# Altium PCB PCB1.PcbDoc
Units mm, origin at the board's own origin, x right, y up, seen from the top; angles counter-clockwise.
Board outline 50.04 x 50.04 mm, 2 copper layers (Top Layer, Bottom Layer); 16 components, 19 nets, 128 pads, 32 vias.
Unrouted connection lines stored in the file: 1.
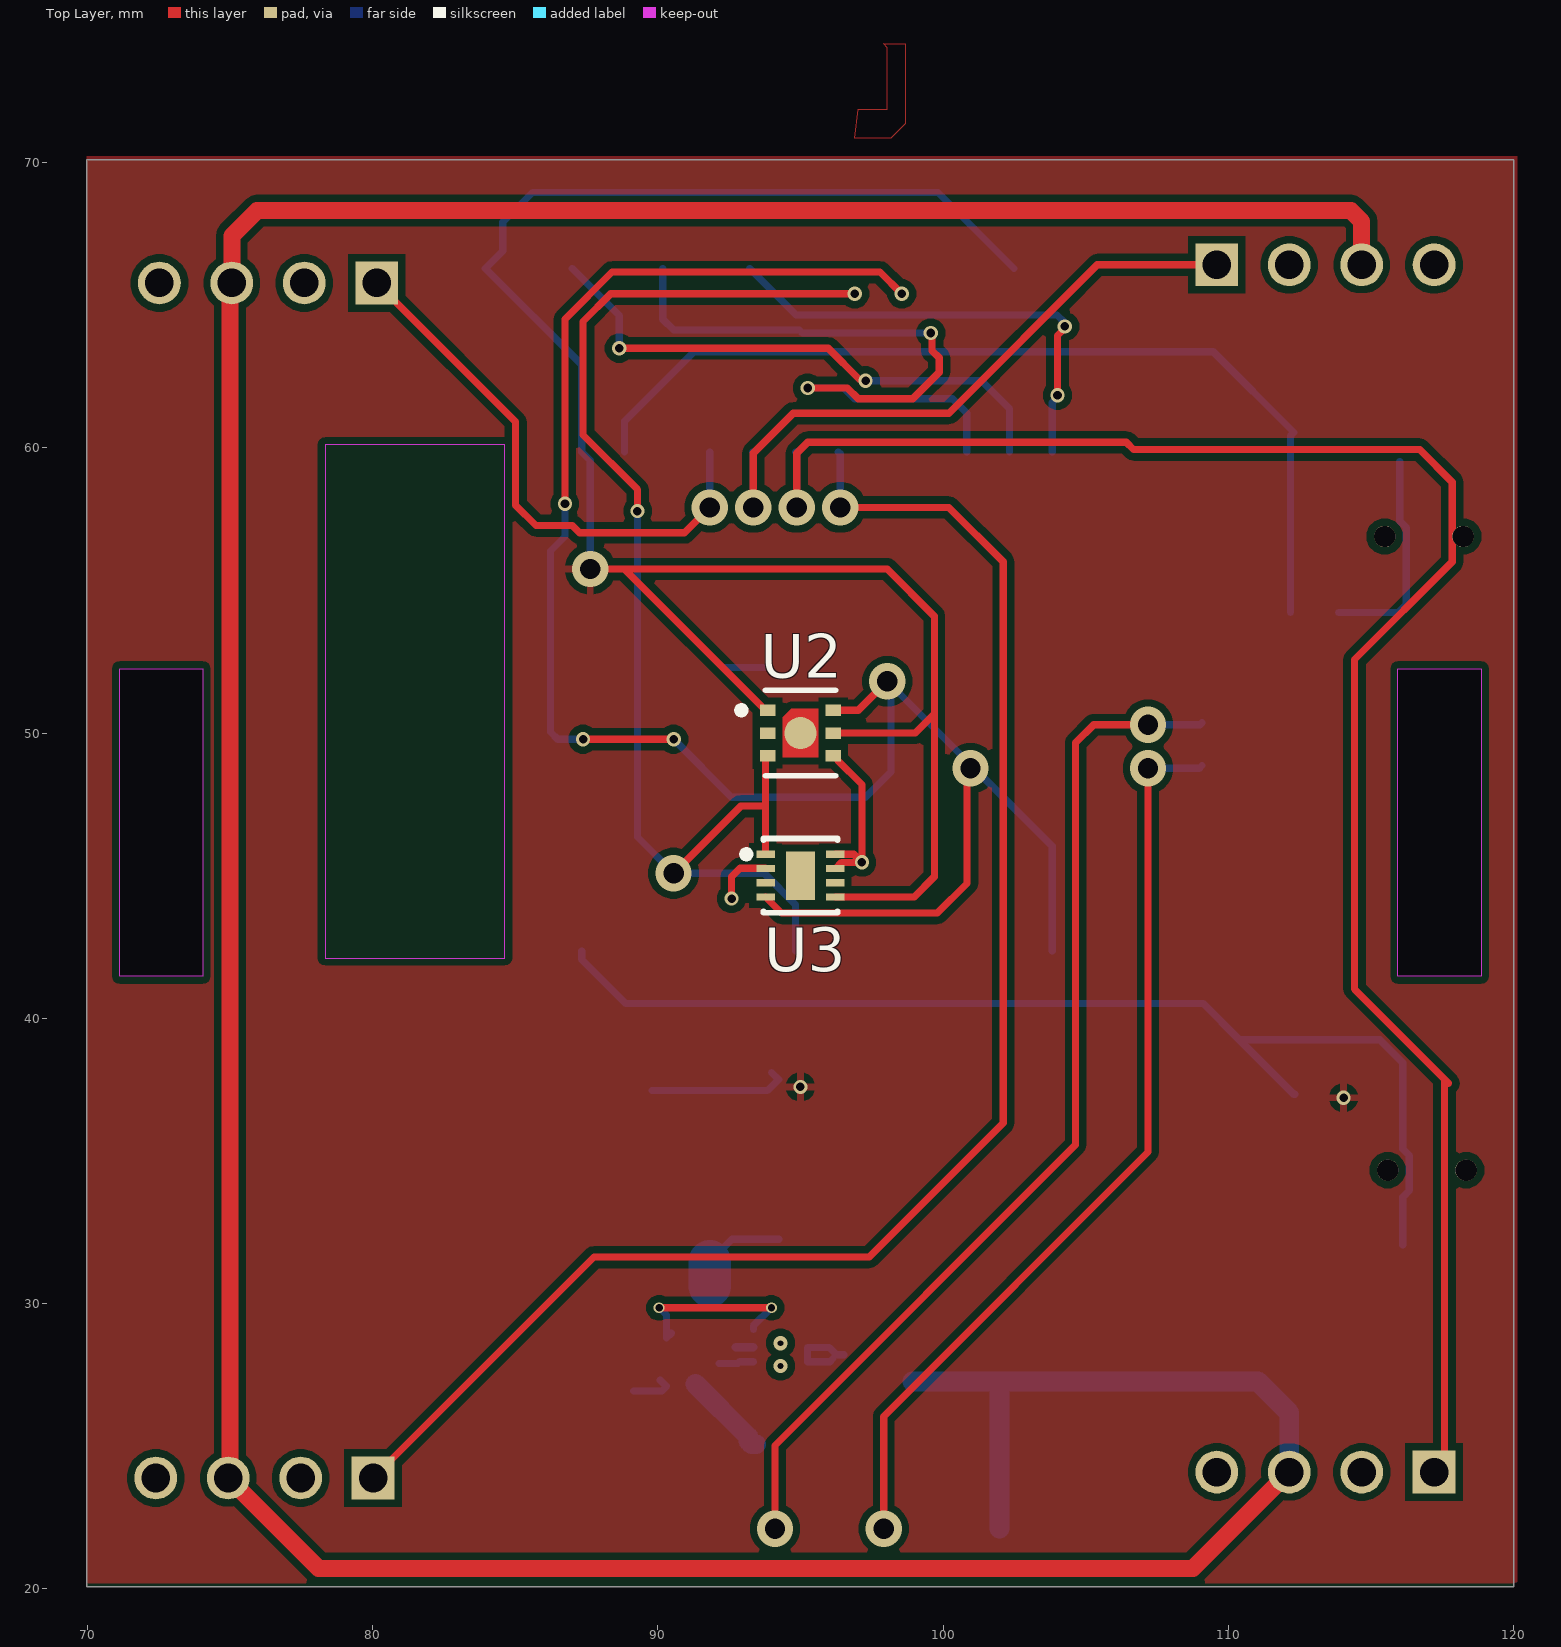
[diagram p0: Top Layer view]
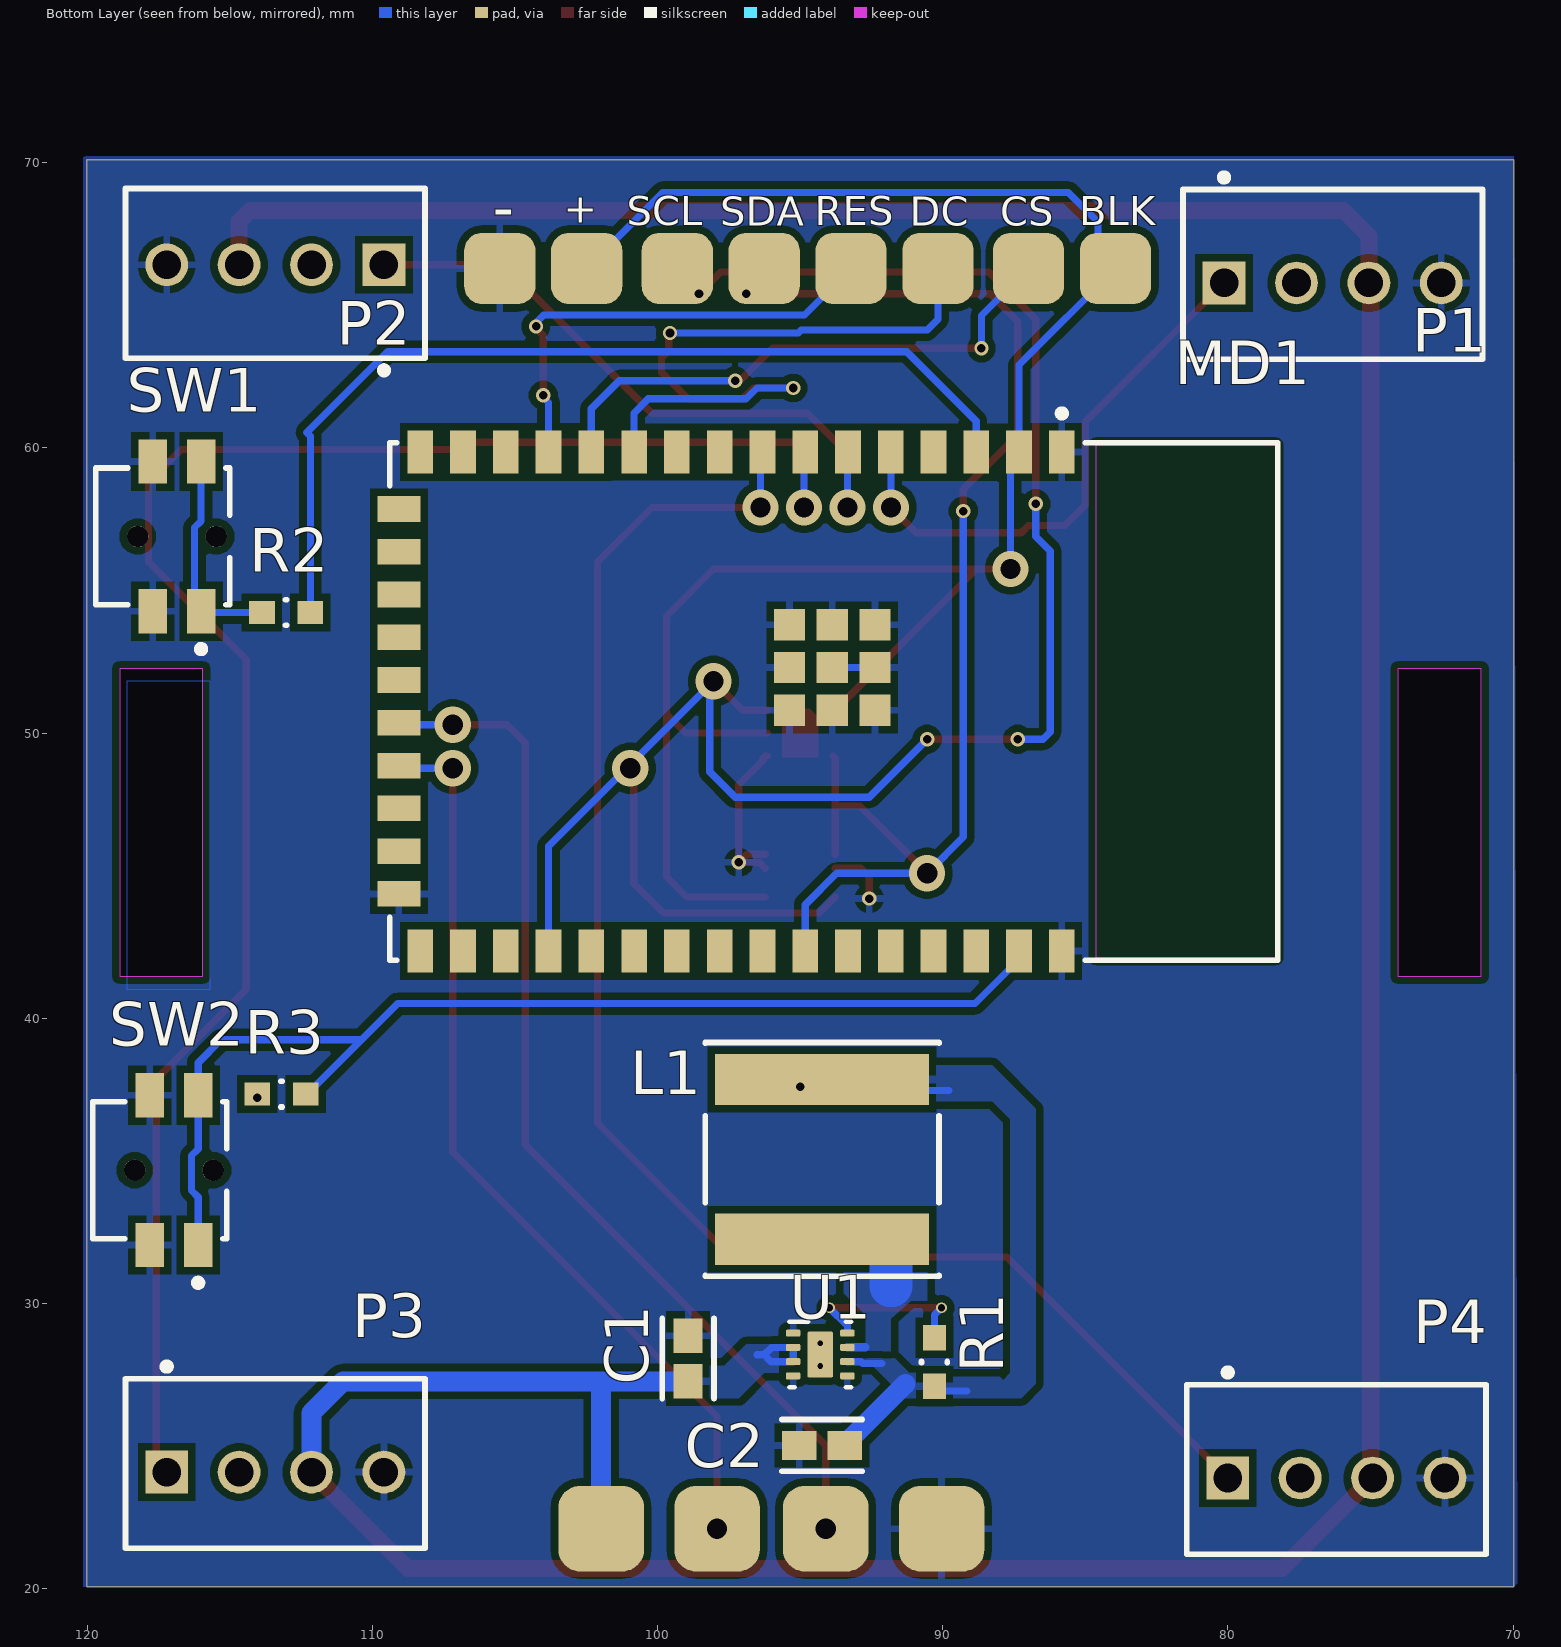
[diagram p1: Bottom Layer view, seen from below]
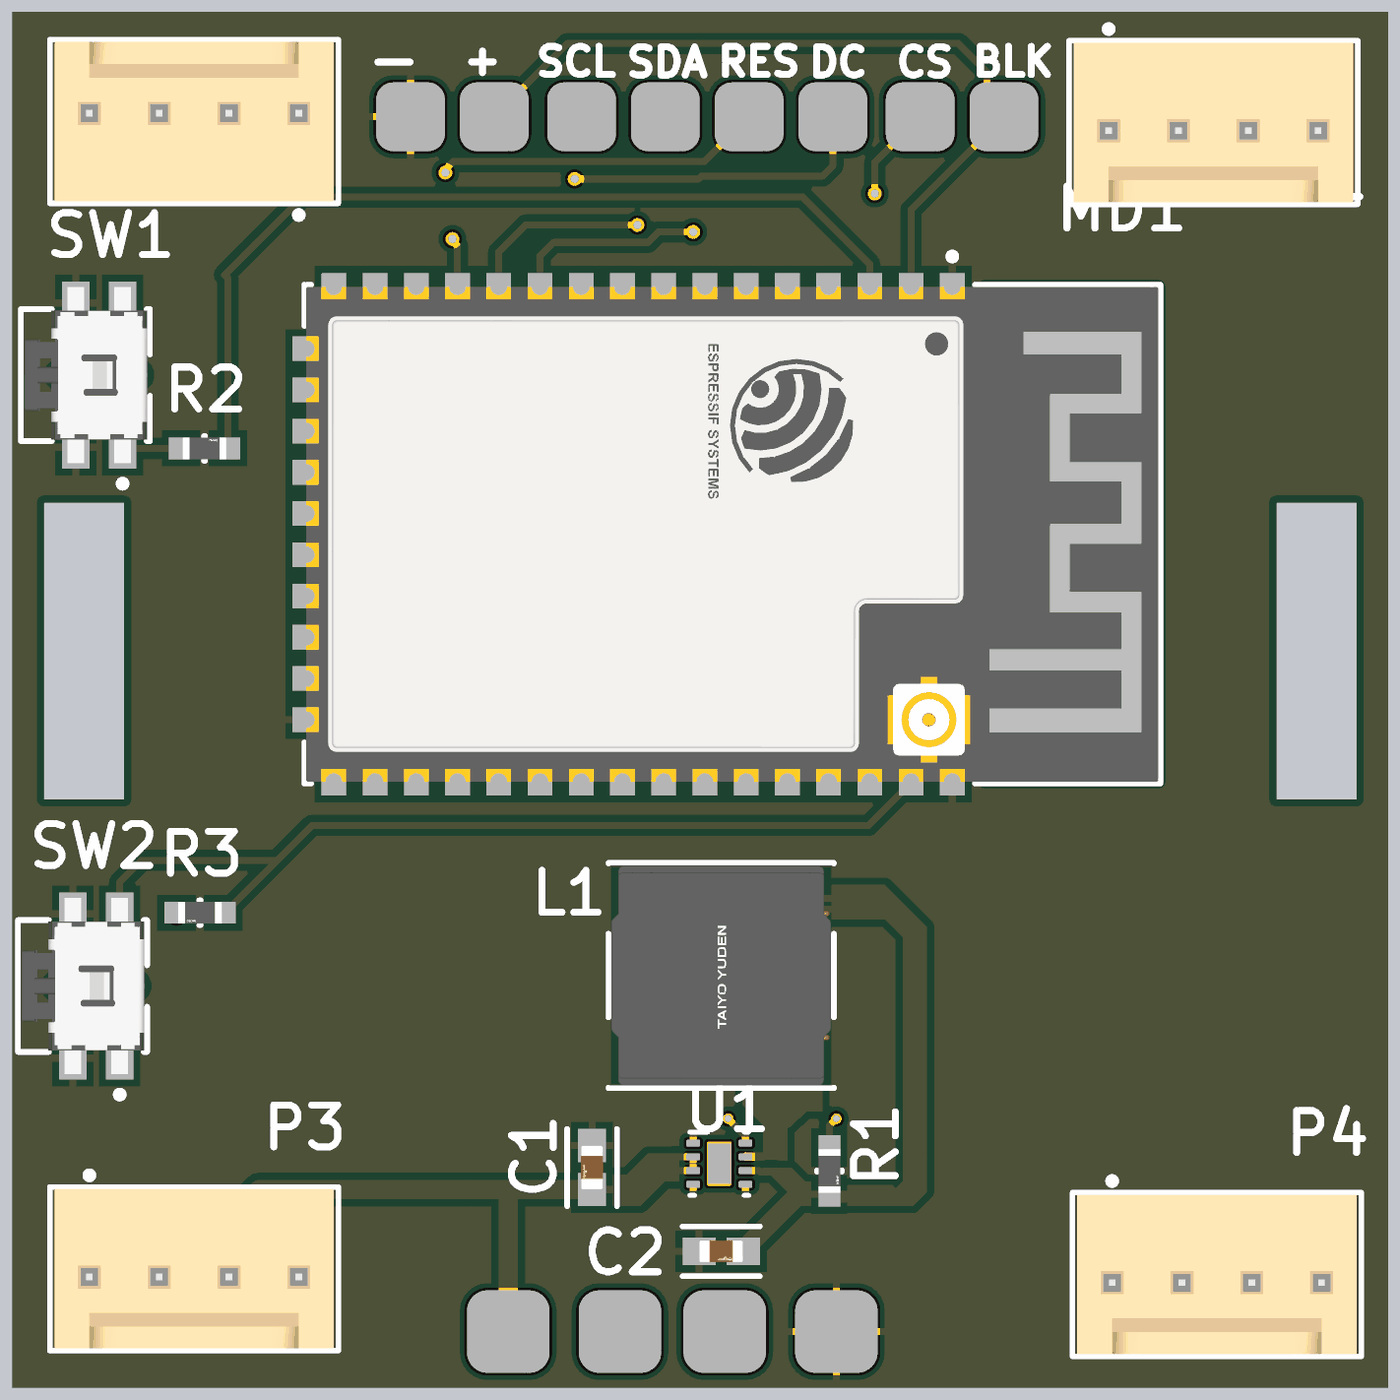
[diagram p2: 3D render of the assembled board from below, using the file's embedded part models]

## Layer stack, top to bottom
Top Solder: solder mask 0.0102, Solder Resist, Dk 3.5
Top Layer: signal copper 0.0356
Dielectric 1: dielectric 0.32, FR-4, Dk 4.8
Bottom Layer: signal copper 0.0356
Bottom Solder: solder mask 0.0102, Solder Resist, Dk 3.5

## Board outline
69.977,20.066 120.015,20.066 120.015,70.104 69.977,70.104
cut-out: 115.951,52.261 118.872,52.261 118.872,41.465 115.951,41.465
cut-out: 71.12,52.261 74.041,52.261 74.041,41.465 71.12,41.465

## Design rules (kind name [scope] priority, off if disabled: settings)
Clearance [All] p1: gap=0.254 ignorepadtopadclearanceinfootprint=FALSE except(0: Arc-Hole Track-Hole SMDPad-Hole THPad-Hole Via-Hole Fill-Hole Poly-Hole Region-Hole Text-Hole)
PolygonConnect [All] p1: connectstyle=Relief reliefconductorwidth=0.254 reliefentries=4 polygonreliefangle="90 Angle" airgapwidth=0.254
RoutingVias [All] p1: holewidth=0.711 width=1.27 viastyle="Through Hole" minholewidth=0.711 minwidth=1.27 maxholewidth=0.711 maxwidth=1.27
SolderMaskExpansion [All] p1: expansion=0.102 istentingtop=FALSE
Width [All] p1: maxlimit=0.254 minlimit=0.254 preferedwidth=0.254
30 further rules are at their usual default settings.

## Components (designator, comment, footprint, x,y, rotation, side; value= is the part's Value field where it differs from the comment)
C1 "10uF 0602" FP-GRM188-0_1-e0_2_0_55-IPC_A 98.933,28.067 r270 bottom
C2 "22uF 0602" FP-GRM188-0_1-e0_2_0_55-IPC_A 94.234,25.019 r180 bottom
L1 "NRS8040T2R0NJGJ" FP-NR8040-H_4_2-MFG 94.234,35.052 r90 bottom
MD1 "ESP32-S2-WROOM" FP-ESP32-S2-WROOM-MFG 93.827,51.11 r270 bottom
P1 "61900411121" 61900411121 76.327,66.086 r0 bottom
P2 "61900411121" 61900411121 113.411,66.121 r180 bottom
P3 "61900411121" 61900411121 113.411,24.384 r0 bottom
P4 "61900411121" 61900411121 76.2,24.176 r0 bottom
R1 "RC0603FR-07100KL" FP-RC0603-0_55-MFG 90.297,27.94 r270 bottom
R2 "RC0603FR-07100KL" FP-RC0603-0_55-MFG 113.03,54.229 r180 bottom
R3 "RC0603FR-07100KL" FP-RC0603-0_55-MFG 113.196,37.338 r0 bottom
SW1 "EVQ-PUC02K" FP-EVQ-PUC02K-MFG 116.862,56.896 r270 bottom
SW2 "EVQ-PUC02K" FP-EVQ-PUC02K-MFG 116.967,34.671 r270 bottom
U1 "TPS62162DSGT" DSG0008A_V 94.3,28.206 r180 bottom
U2 "SGP30-2.5K" FP-SGP30-2_5K-MFG 95,50 r0 top
U3 "SHT31-DIS-B2.5KS" FP-SHT31-DIS-B2_5KS-MFG 95,45 r0 top

## Footprints (in the part's own frame and the unit in brackets; to place one, negate y for a bottom-side part, rotate by r counter-clockwise, add the part's x,y. Pads: shape width x height; smd on the part's side, far side on the other; paste and mask are expansions set on the pad)
61900411121 [mm] "2.54mm Male Locking Header, 4p"
  rect 1.5x1.5 hole 1: 1(3.81,0.3)
  round 1.5 hole 1: 2(1.27,0.3) 3(-1.27,0.3) 4(-3.81,0.3)
  silkscreen extent -5.25,-3.52 5.25,2.98, body extent -5.08,-2.9 5.08,2.9, height 11.53
DSG0008A_V [mm] "SON, 8-Leads, Body 2x2mm, Pitch 0.5mm, Thermal Pad 1.6x0.9mm, TI Recommended"
  rrect40% 0.5x0.25 smd: 1(-0.95,0.75) 2(-0.95,0.25) 3(-0.95,-0.25) 4(-0.95,-0.75) 5(0.95,-0.75) 6(0.95,-0.25) 7(0.95,0.25) 8(0.95,0.75)
  rrect11% 0.9x1.6 smd paste-0.45: 9(0,0)
  silkscreen extent -1.07,-1.15 1.07,1.15, body extent -1.05,-1.05 1.05,1.05, height 0.8
FP-ESP32-S2-WROOM-MFG [mm]
  rect 1.5x0.9 smd paste+0 mask+0: 1(-8.75,8) 2(-8.75,6.5) 3(-8.75,5) 4(-8.75,3.5) 5(-8.75,2) 6(-8.75,0.5) 7(-8.75,-1) 8(-8.75,-2.5) 9(-8.75,-4) 10(-8.75,-5.5) 11(-8.75,-7) 12(-8.75,-8.5) 13(-8.75,-10) 14(-8.75,-11.5) 15(-8.75,-13) 16(-8.75,-14.5) 27(8.75,-14.5) 28(8.75,-13) 29(8.75,-11.5) 30(8.75,-10) 31(8.75,-8.5) 32(8.75,-7) 33(8.75,-5.5) 34(8.75,-4) 35(8.75,-2.5) 36(8.75,-1) 37(8.75,0.5) 38(8.75,2) 39(8.75,3.5) 40(8.75,5) 41(8.75,6.5) 42(8.75,8)
  rect 0.9x1.5 smd paste+0 mask+0: 17(-6.75,-15.25) 18(-5.25,-15.25) 19(-3.75,-15.25) 20(-2.25,-15.25) 21(-0.75,-15.25) 22(0.75,-15.25) 23(2.25,-15.25) 24(3.75,-15.25) 25(5.25,-15.25) 26(6.75,-15.25)
  rect 1.1x1.1 smd paste+0 mask+0: 43(-2.69,-1.55) 43(-2.69,-0.05) 43(-2.69,1.45) 43(-1.19,-1.55) 43(-1.19,-0.05) 43(-1.19,1.45) 43(0.31,-1.55) 43(0.31,-0.05) 43(0.31,1.45)
  Keep-Out Layer region: -9,15.5 9,15.5 9,9.2 -9,9.2
  Keep-Out Layer region: -9,15.5 9,15.5 9,9.2 -9,9.2
  silkscreen extent -10.22,-15.58 9.08,15.58, body extent -9,-15.5 9,15.5, height 3.45
FP-EVQ-PUC02K-MFG [mm]
  rect 1.55x1 smd paste+0 mask+0: 1(2.625,0.85) 2(2.625,-0.85) 3(-2.625,0.85) 4(-2.625,-0.85)
  round 0.75 hole 0.75 unplated paste-1000 mask+0: ""(0,-1.375) ""(0,1.375)
  silkscreen extent -2.4,-2.85 4.07,1.85, body extent -3.2,-2.75 3.2,1.75, height 1.95
FP-GRM188-0_1-e0_2_0_55-IPC_A [mm]
  rect 1.208x1.012 smd paste+0 mask+0: 1(-0.802,0) 2(0.802,0)
  silkscreen extent -1.41,-0.91 1.41,0.91, body extent -0.8,-0.4 0.8,0.4, height 0.9
FP-NR8040-H_4_2-MFG [mm]
  rect 1.8x7.5 smd paste+0 mask+0: 1(-2.8,0) 2(2.8,0)
  silkscreen extent -4.1,-4.1 4.1,4.1, body extent -4,-4 4,4, height 4.2
FP-RC0603-0_55-MFG [mm]
  rect 0.9x0.8 smd paste+0 mask+0: 1(-0.85,0) 2(0.85,0)
  silkscreen extent -0.03,-0.45 0.03,0.45, body extent -0.8,-0.4 0.8,0.4, height 0.55
FP-SGP30-2_5K-MFG [mm]
  rect 0.55x0.4 smd paste-1000 mask-1000: 1(-1.15,0.8) 2(-1.15,0) 3(-1.15,-0.8) 4(1.15,-0.8) 5(1.15,0) 6(1.15,0.8)
  round 1.125 smd paste-1000 mask+0: 7(0,0)
  Top Layer region: -0.625,-0.85 0.625,-0.85 0.625,0.85 -0.325,0.85 -0.625,0.55
  silkscreen extent -2.2,-1.5 1.22,1.5, body extent -1.22,-1.22 1.22,1.22, height 0.9
FP-SHT31-DIS-B2_5KS-MFG [mm]
  rect 0.65x0.25 smd paste-1000 mask+0: 1(-1.225,0.75) 2(-1.225,0.25) 3(-1.225,-0.25) 4(-1.225,-0.75) 5(1.225,-0.75) 6(1.225,-0.25) 7(1.225,0.25) 8(1.225,0.75)
  rect 1x1.7 smd paste-1000 mask+0: 9(0,0)
  silkscreen extent -2.02,-1.3 1.3,1.3, body extent -1.25,-1.25 1.25,1.25, height 1

## Part data
C1 C2: library part CMP-2006-02792-2, "Chip Multilayer Ceramic Capacitors for General Purpose, 0603, 10uF, X5R, 15%, 20%, 6.3V", Capacitance=10uF, Case Code (Imperial)=0603, Case Code (Metric)=1608, Dielectric=X5R, Max Operating Temperature=85°C, Min Operating Temperature=-55°C, Package Quantity=4000, Tolerance=20%, Voltage=6.3V, Case/Package=0603, Depth=0.8mm, Height=0.8mm, Lead Free="Lead Free", Length=1.6mm, Material=Ceramic, Mount="Surface Mount", Packaging="Tape and Reel", Radiation Hardening=No, REACH SVHC="No SVHC", Termination=SMD/SMT, Thickness=0.035inch, Voltage Rating=6.3V, Voltage Rating (DC)=6.3V, Width=0.031inch
L1: library part CMP-14484-001195-1, "Shielded Wirewound Inductor 2uH 30% 7.6A 11.7mΩ SMD", Case/Package=8040, Current Rating=6.3A, DC Resistance (DCR)=11.7mR, Inductance=2uH, Inductance Tolerance=30%, Max DC Current=8.1A, Max Operating Temperature=125°C, Min Operating Temperature=-25°C, Package Quantity=1000, Resistor Type=Wirewound, Self Resonant Frequency=50MHz, Test Frequency=100kHz, Core Material=Ferrite, Depth=8.2mm, Halogen Free="Halogen Free", Height=4mm, Height - Seated (Max)=0.157inch, Lead Free="Lead Free", Lead Pitch=5.6mm, Length=8mm, Mount="Surface Mount", Number of Pins=2, Packaging="Tape and Reel", Radiation Hardening=No, RMS Current (Irms)=6.3A, RoHS Compliant=Yes, Saturation Current=8.1A, Series=NRS, Shielding=Shielded, Termination=SMD/SMT, Tolerance=30%, Width=0.315inch
MD1: library part CMP-194065-000020-1, "RX TXRX MOD WIFI SURFACE MOUNT"
P1 P2 P3 P4: library part CMP-1502-00586-1, "Male Locking Header WR-WTB, THT, Vertical, pitch 2.54 mm, 1 x 4 position", Contact Resistance=20mOhm, Manufacturer="Wurth Elektronik", Operating Temperature=-40to105degC, Working Voltage=250VAC, Datasheet URL=https://katalog.we-online.de/em/datasheet/6190xx11121.pdf, Gender=Male, Manufacturer URL=http://www.we-online.de, Mounting Technology=THT, Orientation=Vertical, Package Reference=61900411121, Packaging=Bag, Part Number=61900411121, Pitch=2.54mm, Position=1x4, Publisher=WurthElektronik
R1 R2 R3: library part CMP-2100-03662-2, "RES SMD 100K OHM 1% 1/10W 0603", Case Code (Imperial)=0603, Case Code (Metric)=1608, Max Operating Temperature=155°C, Max Power Dissipation=100mW, Min Operating Temperature=-55°C, Resistance=100kR, Resistance Tolerance=1%, Resistor Type="Thick Film", Temperature Coefficient=100ppm/°C, Voltage Rating=50V, Working Voltage=75V, Case/Package=0603, Construction=Rectangular, Depth=0.8mm, Features="Moisture Resistant", Height=0.45mm, Lead Free="Lead Free", Length=1.6mm, Military Standard=Not, Number of Pins=2, Number of Terminations=2, Packaging="Tape and Reel", Power Rating=100mW, REACH SVHC="No SVHC", RoHS Compliant=Yes, Series=RC, Technology="THICK FILM", Termination=SMD/SMT, Tolerance=1%, Voltage Rating (DC)=50V, Width=0.8mm
SW1 SW2: library part CMP-05618-000046-1, "SWITCH TACTILE SPST-NO 0.05A 12V", Actuator Color=Black, Contact Current Rating=50mA, Contact Resistance=500mR, Max Operating Temperature=70°C, Max Voltage Rating (DC)=12V, Min Operating Temperature=-40°C, Operating Force=2.2N, Package Quantity=1, Actuator Length=1mm, Contact Plating=Silver, Current Rating=50mA, Depth=4.5mm, Electrical Life=100000Cycles, Height=1.65mm, Illumination Type=Non-Illuminated, Lead Free="Lead Free", Length=6.4mm, Max Current Rating=50mA, Mechanical Life=100000Cycles, Mount="Surface Mount", Orientation=Straight, Packaging="Tape and Reel", Radiation Hardening=No, RoHS Compliant=Yes, Series=EVQPU, Size=3.5mm, Switch Function=Off-Mom, Switch Travel=0.3mm, Termination="Gull Wing", Throw Configuration=SPST, Voltage Rating (DC)=12V, Width=3.5mm
U1: library part CMP-0323-00319-3, "Buck Step Down Regulator with 3 to 17 V Input and 3.3 V Output, -40 to 85 degC, 8-Pin WSON (DSG), Green (RoHS & no Sb/Br)", Manufacturer="Texas Instruments", Rating=Catalog, Switch Current Limit(Typ)(A)=1.8, Code_JEDEC=MO-229, ComponentLink1Description=Datasheet, ComponentLink1URL=http://www.ti.com/general/docs/lit/getliterature.tsp?genericPartNumber=TPS62162&fileType=pdf, ComponentLink2Description="Package Specification", ComponentLink2URL=http://www.ti.com/litv/pdf/mpds308a, ComponentLink3Description="URL Link1", ComponentLink3URL="Samples URL:http://www.ti.com/product/tps54611#samples", DatasheetVersion=SLVSAM2A, Duty Cycle(Max)(%)=100, Eco-Plan="Green (RoHS & no Sb/Br)", Iout(Max)(A)=1, Iq(Typ)(mA)=0.017, Mounting Technology="Surface Mount", PackageDescription="8-Pin Plastic Small Outline No-Lead, 2 x 2 x 0.8 mm Body, 0.5 mm Pitch, Exposed Pad", PackageReference=DSG0008A, PackageVersion="revB, Oct-2010", PartNumber=TPS62162DSGT, Preset Vout(V)=3.3, Regulated Outputs(#)=1, SubFamily="Step-Down Regulator", Synchronous Rectification=TRUE, Topology=Buck, Vin(Max)(V)=17, Vin(Min)(V)=3, Vout(Max)(V)=3.3, Vout(Min)(V)=3.3
U2: library part CMP-144026-000002-1, "AIR QUALITY GAS SENSOR FOR VOC'S", Manufacturer=Sensirion, Max Supply Voltage=1.98V, Min Supply Voltage=1.62V, Operating Supply Current=48.8mA, Temperature="-40°C to +85°C", Temperature Range High=+85°C, Temperature Range Low=-40°C, Automotive=No, Category=IC, ComponentLink2Description=Datasheet, ComponentLink2URL=https://www.sensirion.com/fileadmin/user_upload/customers/sensirion/Dokumente/0_Datasheets/Gas/Sensirion_Gas_Sensors_SGP30_Datasheet.pdf, Device Class L1=Sensors, Device Class L2=unset, Device Class L3=unset, Digikey Description="AIR QUALITY GAS SENSOR FOR VOC'S", Height=0.9mm, Lead Free=Yes, Manufacturer Part Number=SGP30-2.5K, Octopart=https://octopart.com/sgp30-2.5k-sensirion-84561789, Package=SGP30-2.5K, RoHS=TRUE, Sensor Output=I2C
U3: library part CMP-144040-000009-1, "SENSOR HUMID/TEMP 5V I2C 2% SMD", RoHS Compliant=Yes

## Free pads (board coordinates)
  rrect50% 3x3 smd far side: 2(94.107,22.098) 2(97.917,22.098) GND(90.043,22.098) Vin(101.981,22.098)
  rrect50% 2.5x2.5 smd far side: ""(83.947,66.294) ""(86.995,66.294) ""(90.17,66.294) ""(93.218,66.294) ""(96.266,66.294) ""(99.314,66.294) ""(102.489,66.294) ""(105.537,66.294)

## Via types
v1: diameter 0.5, hole 0.3, Top Layer to Bottom Layer, 16 vias
v2: diameter 1.27, hole 0.711, Top Layer to Bottom Layer, 12 vias
v3: diameter 0.5, hole 0.2, Top Layer to Bottom Layer, 2 vias
v4: diameter 0.381, hole 0.254, Top Layer to Bottom Layer, 2 vias

## Nets (pads, with @x,y where several pads share a name; then routed paths per layer and width w, separated by ;. In a path a pad name is that pad's centre, name@x,y a point inside that pad or via, vN(x,y) a via of type N, cw(c..) or ccw(c..) an arc to the next point about the centre after c; other vN are vias at no path point)
CS: MD1.12 pad.@86.995,66.294 | length 19.3
  Top Layer w0.254: v1(88.646,63.5) 95.972,63.5 v1@97.072,62.401
  Bottom Layer w0.254: pad.@86.995,66.294 88.646,64.643 v1(88.646,63.5) ; v1(97.282,62.357) 101.346,62.357 102.327,61.376 MD1.12
D+: MD1.22 pad.2@94.107,22.098 | length 36.6
  Top Layer w0.254: v2(94.107,22.098) 94.107,25.019 104.648,35.56 104.648,49.657 105.283,50.292 v2(107.188,50.292)
  Bottom Layer w0.254: v2(107.188,50.292) 109.009,50.292 MD1.22
D-: MD1.23 pad.2@97.917,22.098 | length 32.4
  Top Layer w0.254: v2(97.917,22.098) 97.917,26.035 107.188,35.306 v2(107.188,48.768)
  Bottom Layer w0.254: v2(107.188,48.768) 108.985,48.768 MD1.23
DC: MD1.11 pad.@90.17,66.294 | length 25.3
  Top Layer w0.254: v1(95.25,62.103) 96.644,62.103 97.021,61.726 98.937,61.726 99.866,62.655 99.866,63.16 99.615,63.41 99.615,63.985 v1(99.568,64.032)
  Bottom Layer w0.254: pad.@90.17,66.294 90.17,64.516 90.551,64.135 94.963,64.135 95.066,64.032 v1(99.568,64.032) ; v1(95.25,62.103) 96.52,62.103 96.901,61.722 100.33,61.722 100.827,61.225 MD1.11
EN: MD1.41 R3.1 SW2.1 SW2.3 | length 39.9
  Bottom Layer w0.254: MD1.41 87.327,42.06 88.874,40.513 109.121,40.513 110.391,39.243 ; R3.1 112.296,37.338 110.391,39.243 ; SW2.1 116.117,33.724 116.348,33.955 116.348,35.186 116.117,35.417 SW2.3 116.117,38.442 115.316,39.243 110.391,39.243
GND: C1.1 C2.1 MD1.1 MD1.26 MD1.42 MD1.43 P1.4 P2.4 P3.4 P4.4 pad.@105.537,66.294 pad.GND SW1.2 SW1.4 SW2.2 SW2.4 U1.1 U1.4 U1.5 U2.2 U2.4 U3.2 U3.7 U3.8 | length 9.8
  Top Layer w0.254: v1(92.583,44.196) 92.583,44.958 92.881,45.256 U3.2@93.775,45.256 ; U2.4 96.225,49.2 96.298,49.127 96.298,49.052 97.155,48.195 v1(97.155,45.466) ; U3.7@96.225,45.252 96.439,45.466 v1(97.155,45.466) ; U3.8 96.871,45.75 v1(97.155,45.466)
  Bottom Layer w0.254: MD1.43@92.377,52.3 MD1.43@93.877,52.3
IO0: MD1.3 R2.2 | length 33.1
  Bottom Layer w0.254: MD1.3 88.827,60.935 91.265,63.373 109.474,63.373 112.307,60.54 112.18,60.413 R2.2
NetL1_1: L1.1 U1.7 | length 4.3
  Bottom Layer w0.254: L1.1@91.821,31.479 92.594,32.252 L1.1 ; 92.71,28.448 92.726,28.464
  Bottom Layer w0.3: 92.726,28.464 U1.7@93.35,28.464
  Bottom Layer w1.5: 91.821,30.607 L1.1@91.821,31.479
NetR2_1: R2.1 SW1.1 SW1.3 | length 7.6
  Bottom Layer w0.254: R2.1 115.97,54.229 SW1.1 116.243,54.502 116.243,57.209 116.012,57.44 SW1.3
PG: R1.1 U1.8 | length 6.4
  Top Layer w0.254: v4(90.043,29.845) v4(93.98,29.845)
  Bottom Layer w0.254: v4(90.043,29.845) 90.297,29.591 R1.1 R1.1@90.463,28.956 ; 93.347,29.083 93.347,29.212 v4(93.98,29.845)
PWM1: MD1.5 P1.1 | length 19.3
  Top Layer w0.254: P1.1 85.008,60.915 85.008,57.994 85.725,57.277 86.995,57.277 87.249,57.023 90.932,57.023 v2(91.821,57.912)
  Bottom Layer w0.254: v2(91.821,57.912) 91.821,59.854 MD1.5
PWM2: MD1.6 P2.1 | length 22.9
  Top Layer w0.254: v2(93.345,57.912) 93.345,59.817 94.746,61.218 100.207,61.218 105.41,66.421 P2.1
  Bottom Layer w0.254: MD1.6 93.345,59.842 v2(93.345,57.912)
PWM3: MD1.7 P3.1 | length 65.4
  Top Layer w0.254: v2(94.869,57.912) 94.869,59.817 95.25,60.198 106.426,60.198 106.68,59.944 116.713,59.944 117.856,58.801 117.856,56.007 114.427,52.578 114.427,41.021 117.586,37.862 ; P3.1 117.586,24.449 117.586,37.862 ; 117.729,37.719 117.586,37.862
  Bottom Layer w0.254: MD1.7 94.869,59.818 v2(94.869,57.912)
PWM4: MD1.8 P4.1 | length 55.4
  Top Layer w0.254: P4.1 87.757,31.623 97.409,31.623 102.108,36.322 102.108,56.007 100.203,57.912 v2(96.393,57.912)
  Bottom Layer w0.254: MD1.8 96.393,59.794 v2(96.393,57.912)
Res: MD1.13 pad.@93.218,66.294 | length 16.4
  Top Layer w0.254: v1(104.013,61.849) 104.013,63.941 104.267,64.195 v1(104.267,64.262)
  Bottom Layer w0.254: pad.@93.218,66.294 94.849,64.663 103.993,64.663 v1@104.267,64.389 ; MD1.13 103.827,61.596 104.013,61.782 v1(104.013,61.849)
SCL: MD1.30 pad.@99.314,66.294 U2.6 U3.4 | length 69.4
  Top Layer w0.254: v1(86.741,58.039) 86.741,64.516 88.392,66.167 97.79,66.167 v1(98.552,65.405) ; v1(87.376,49.784) v1(90.551,49.784) ; U3.4 94.337,43.688 99.8,43.688 100.838,44.726 v2@100.838,48.387 ; U2.6 97.028,50.8 v2(98.044,51.816)
  Bottom Layer w0.254: v1(86.741,58.039) 86.741,56.896 86.233,56.388 86.233,50.038 86.487,49.784 v1(87.376,49.784) ; v1(90.551,49.784) 92.583,47.752 97.282,47.752 98.171,48.641 v2@98.171,51.689 ; v2(98.044,51.816) v2@98.171,51.689 ; MD1.30 103.827,46.033 v2@98.171,51.689
  other v2: 100.965,48.768
"SDA ": MD1.36 pad.@96.266,66.294 U2.3 U3.1 | length 44.6
  Top Layer w0.254: v1(89.281,57.785) 89.281,58.547 87.376,60.452 87.376,64.433 88.348,65.405 v1(96.901,65.405) ; v2(90.551,45.085) 92.905,47.439 93.775,47.439 ; U3.1 93.775,47.439 ; U2.3 93.848,49.2 93.775,49.127 93.775,47.439
  Bottom Layer w0.254: v1(89.281,57.785) 89.281,46.355 v2(90.551,45.085) 93.726,45.085 94.827,43.984 MD1.36
VDD: C2.2 L1.2 MD1.2 pad.@83.947,66.294 pad.@102.489,66.294 R1.2 R3.2 U1.6 U2.1 U2.5 U3.5 | length 80.9
  Top Layer w0.254: v2(87.63,55.753) 88.822,55.753 ; U2.1 93.775,50.8 88.822,55.753 ; U2.5 99.022,50 99.695,50.673 ; U3.5 98.987,44.25 99.695,44.958 99.695,50.673 ; 88.822,55.753 98.044,55.753 99.695,54.102 99.695,50.673
  Bottom Layer w0.254: v2(87.63,55.753) 87.63,59.557 MD1.2 87.327,62.914 83.947,66.294 84.562,66.909 84.562,67.925 85.598,68.961 99.822,68.961 pad.@102.489,66.294 ; 89.154,26.924 90.131,26.924 R1.2 R1.2@90.082,27.305 ; 89.789,37.465 93.847,37.465 L1.2 L1.2@93.986,38.1 ; 91.313,27.04 91.313,27.178 ; 92.138,27.895 92.807,27.895 92.868,27.956 U1.6
  Bottom Layer w0.7: 91.313,27.178 93.178,25.313 93.178,25.175 93.294,25.059 C2.2@93.432,25.059
  other v1: 114.046,37.211 94.996,37.592
Vin: C1.2 P1.3 P2.3 P3.3 P4.3 pad.Vin U1.2 U1.3 | length 149.1
  Top Layer w0.254: P4.3 P4.3@74.993,23.939 ; P1.3@74.993,65.722 P1.3 ; P3.3@111.951,23.894 P3.3
  Top Layer w0.6: P4.3 78.105,20.701 108.758,20.701 P3.3@111.951,23.894 ; P4.3@74.993,23.939 P1.3@74.993,65.722 ; P1.3 75.057,67.437 75.946,68.326 114.3,68.326 114.681,67.945 P2.3
  Bottom Layer w0.254: U1.3 96.028,27.956 96.139,28.067 ; U1.3@95.265,27.976 95.25,27.991 U1.2 96.004,28.456 96.266,28.194 96.52,28.194 ; 101.64,27.265 101.981,26.924
  Bottom Layer w0.7: C1.2 101.64,27.265 111.038,27.265 112.141,26.162 P3.3 ; pad.Vin 101.981,26.924
pads on no net: MD1.4 MD1.9 MD1.10 MD1.14 MD1.15 MD1.16 MD1.17 MD1.18 MD1.19 MD1.20 MD1.21 MD1.24 MD1.25 MD1.27 MD1.28 MD1.29 MD1.31 MD1.32 MD1.33 MD1.34 MD1.35 MD1.37 MD1.38 MD1.39 MD1.40 P1.2 P2.2 P3.2 P4.2 SW1. SW2. U1.9 U2.7 U3.3 U3.6 U3.9
copper on no net:
  other v3: 94.3,27.806 94.3,28.606

## Polygon pours and split planes (outlines as drawn)
VDD on Top Layer "VDD_L01_P008" (solid, pour order 8): 69.977,70.231 120.142,70.231 120.142,20.066 120.015,20.193 69.977,20.193
no net on Top Layer "NONET_L01_P004" (solid, shelved, pour order 4): 97.028,71.882 98.044,71.882 98.044,74.041 97.917,74.168 98.679,74.168 98.679,71.374 98.171,70.866 96.901,70.866
no net on Bottom Layer "NONET_L02_P010" (solid, pour order 10): 115.697,51.816 118.618,51.816 118.618,41.021 115.697,41.021
GND on Bottom Layer "GND_L02_P009" (solid, pour order 9): 69.977,70.231 120.015,70.231 120.142,70.358 120.142,20.066 69.977,20.066 69.85,20.193
NetL1_1 on Bottom Layer "NetL1_1" (solid, pour order 0): 92.71,28.321 92.71,28.448 92.71,29.591 93.472,30.353 93.472,31.877 91.059,31.877 90.932,31.75 90.551,31.75 90.551,30.099 91.113,30.099 91.821,29.464 91.821,28.321 91.948,28.321
VDD on Bottom Layer "VDD_L02_P001" (solid, pour order 1): 93.599,27.94 93.599,27.813 92.456,27.813 91.313,26.67 90.297,26.67 90.297,27.432 90.424,27.559 91.186,27.559 91.694,28.067 93.599,28.067
Vin on Bottom Layer "VIN_L02_P002" (solid, pour order 2): 95.758,27.559 96.266,27.559 97.155,26.67 98.679,26.67 98.679,27.813 97.663,27.813 96.901,28.575 95.758,28.575 95.758,27.686
VDD on Bottom Layer "VDD_L02_P003" (solid, pour order 3): 91.059,37.084 88.265,37.084 87.63,36.449 87.63,27.559 87.884,27.305 88.011,27.432 90.043,27.432 90.043,26.67 87.249,26.67 86.741,27.178 86.741,36.83 88.265,38.354 91.059,38.354

## Silkscreen, mask and mechanical layers (free items; w line width, h text height)
Bottom Overlay:
  text "+" at 102.118,67.889 h1.02
  text "BLK" at 85.217,67.818 h1.02
  text "RES" at 94.488,67.818 h1.02
  text "SCL" at 101.092,67.818 h1.02
  text "CS" at 87.993,67.8 h1.02
  text "DC" at 91.168,67.8 h1.02
  text "SDA" at 97.808,67.8 h1.02
  text "-" at 105.029,67.691 h1.52
Mechanical 1:
  the board outline again, w1.2